# EAGLE board dual-led-wireless-dimmer-tx (EAGLE 8.6.0)
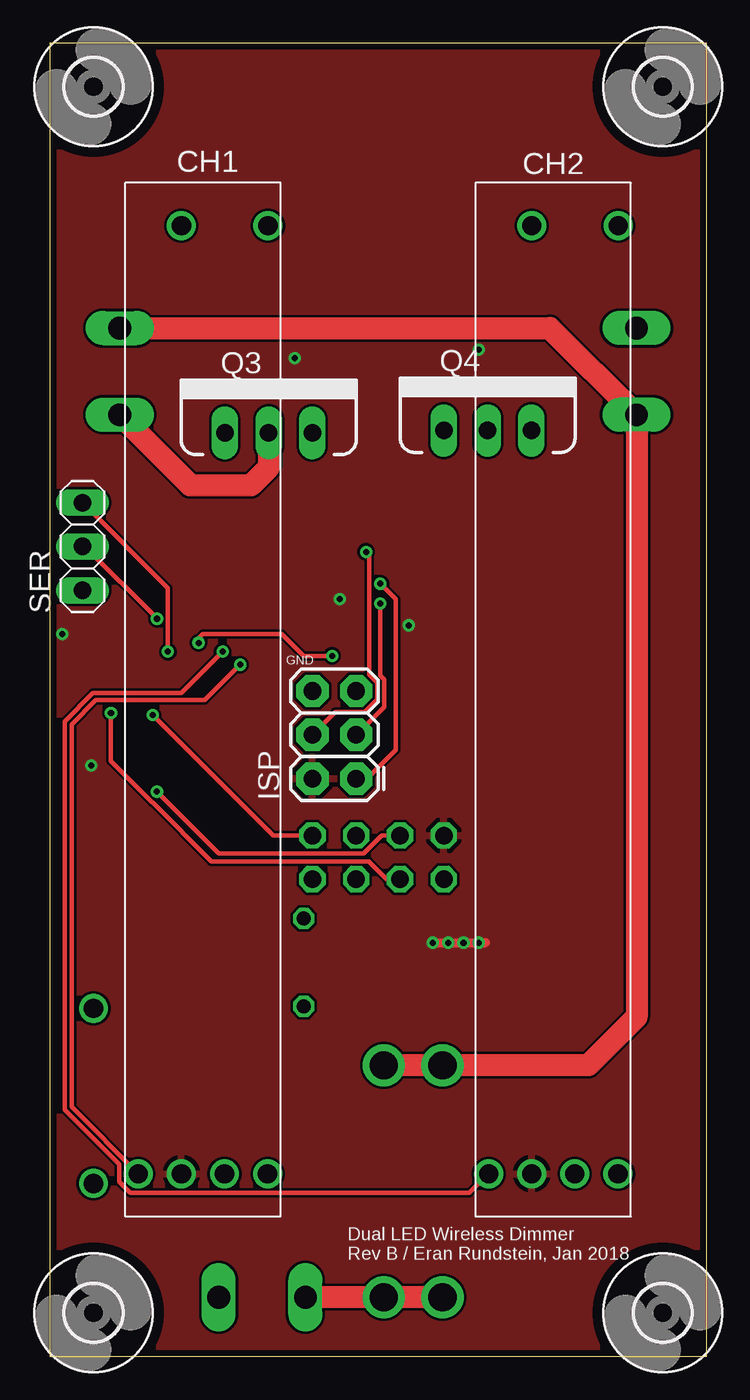
[diagram p0: board, top side]
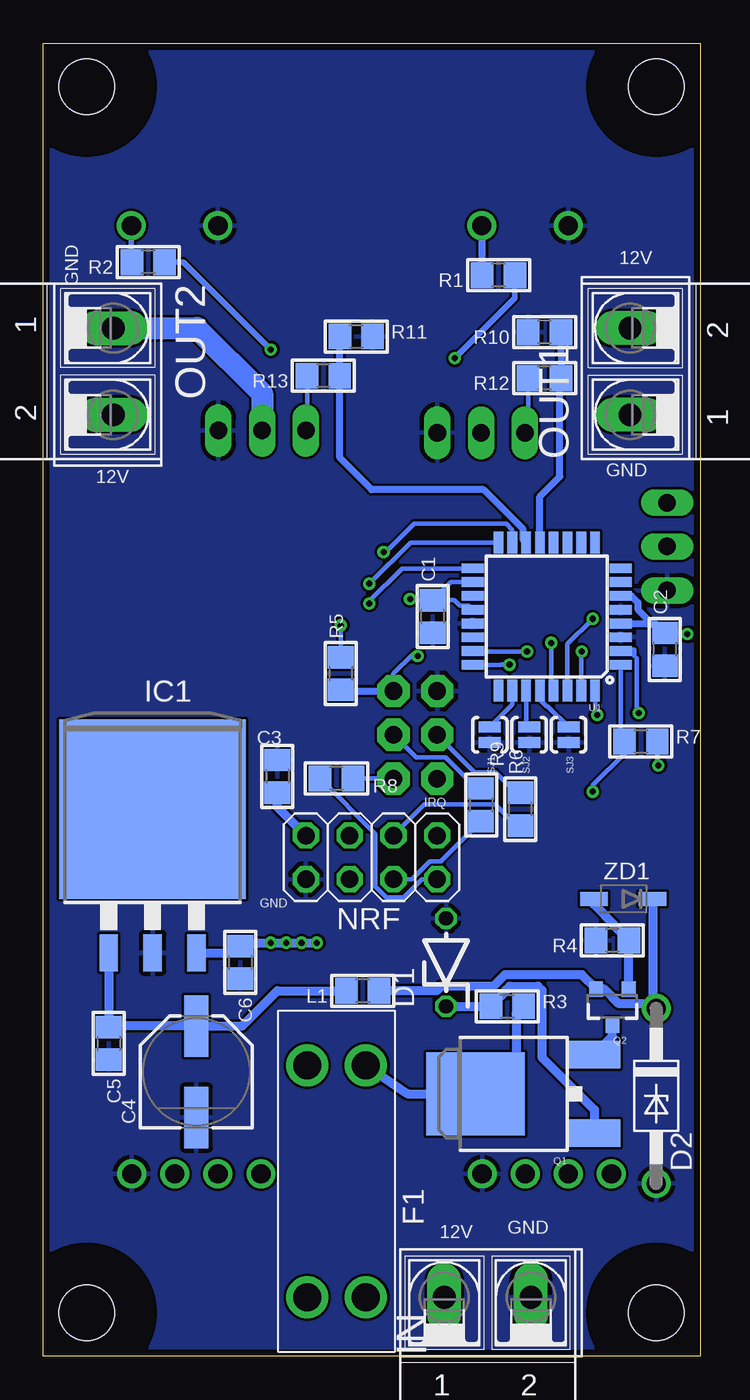
[diagram p1: board, bottom side, seen from below]

Size 38.1 x 76.2 mm. Coordinates in mm from the lower left corner, seen from the top.
Outline: 0,0 38.1,0 38.1,76.2 0,76.2 0,0
Copper layers (1*16): Top 0.0356mm / dielectric 1.5011mm / Bottom 0.0356mm
Design rules "oshpark-2layer-2017-05 *": minimum track width 6mil, minimum drill 13mil, track to track 6mil, track to pad 6mil, pad to pad 6mil, via to via 6mil, smd to smd 6mil, copper to edge 15mil, drill to drill 6mil, minimum pad ring 7mil, minimum via ring 7mil, stop-mask expansion 2.5mil, vias tented up to drill 0mil, thermal gap 10mil
Net classes: 0 default: width 0.254 mm; 1 3.3v: width 0.406 mm

## Footprints (pad centres in the part's own frame; a part is rotated, then mirrored left to right if it is on the bottom)
0805 = smd 1.3 x 1.5: 1 -0.95,0; 2 0.95,0
PANASONIC_D = smd 3.556 x 1.4: + 2.654,0; - -2.654,0
BOURNS-PTL45 = drill 1.118: 1 -27.5,1.25; 2 -27.5,3.75; 3 27.5,1.25; B 27.5,-3.77; E -27.5,-3.75; L -27.5,-1.25
ZDIO-5 = drill 0.813 octagon: A 2.54,0; C -2.54,0
DO41Z10 = drill 1.118: A 5.08,0; C -5.08,0
KEYSTONE-3557-2 = drill 1.626: L1 -6.731,1.702; L2 -6.731,-1.702; R1 6.731,1.702; R2 6.731,-1.702
3,2 = hole 3.2: 0,0
TO263-3 = smd 1.067 x 2.159: 1 -2.54,-5.791; 2 0,-5.791; 3 2.54,-5.791 | smd 10.8 x 10.41: TAB 0,2.54
AK500/2-H = drill 1.321 long: 1 -2.515,0; 2 2.515,0
2X3 = drill 1.016 pad 1.88 octagon: 1 0,0; 2 0,2.54; 3 2.54,0; 4 2.54,2.54; 5 5.08,0; 6 5.08,2.54
2X04 = drill 1.016 octagon: 1 -3.81,-1.27; 2 -3.81,1.27; 3 -1.27,-1.27; 4 -1.27,1.27; 5 1.27,-1.27; 6 1.27,1.27; 7 3.81,-1.27; 8 3.81,1.27
DPAK = smd 1.6 x 3: 1 -2.28,-5.31; 3 2.28,-5.31 | smd 4.826 x 5.715: 4 0,1.588
SOT23-3 = smd 0.8 x 0.9: 1 -0.95,-1; 2 0.95,-1; 3 0,1.1
TO220V = drill 1.016 long: 1 -2.54,0; 2 0,0; 3 2.54,0
1X03 = drill 1.016 long: 1 -2.54,0; 2 0,0; 3 2.54,0
SJ_2S-NO = smd 0.635 x 1.27: 1 -0.45,0; 2 0.45,0
TQFP32-08 = smd 1.27 x 0.559: 1 -4.293,2.8; 2 -4.293,2; 3 -4.293,1.2; 4 -4.293,0.4; 5 -4.293,-0.4; 6 -4.293,-1.2; 7 -4.293,-2; 8 -4.293,-2.8; 17 4.293,-2.8; 18 4.293,-2; 19 4.293,-1.2; 20 4.293,-0.4; 21 4.293,0.4; 22 4.293,1.2; 23 4.293,2; 24 4.293,2.8 | smd 0.559 x 1.27: 9 -2.8,-4.293; 10 -2,-4.293; 11 -1.2,-4.293; 12 -0.4,-4.293; 13 0.4,-4.293; 14 1.2,-4.293; 15 2,-4.293; 16 2.8,-4.293; 25 2.8,4.293; 26 2,4.293; 27 1.2,4.293; 28 0.4,4.293; 29 -0.4,4.293; 30 -1.2,4.293; 31 -2,4.293; 32 -2.8,4.293
SOD123 = smd 1.6 x 0.8: A 1.7,0; C -1.7,0

## Placement (x,y rotation side)
C1  0.1uF  [0805]  15.49,42.93 90 bottom
C2  0.1uF  [0805]  2.03,41.02 90 bottom
C3  4.7uF  [0805]  24.51,33.66 270 bottom
C4  100uF  [PANASONIC_D]  29.21,16.51 90 bottom
C5  0.1uF  [0805]  34.29,18.16 270 bottom
C6  10uF  [0805]  26.67,22.86 270 bottom
CH1  PTL45  [BOURNS-PTL45]  8.89,38.1 90 top
CH2  PTL45  [BOURNS-PTL45]  29.21,38.1 90 top
D1  17V (1N5247B)  [ZDIO-5]  14.73,22.86 90 bottom
D2  24v 1N5359B  [DO41Z10]  2.54,15.11 270 bottom
F1  KEYSTONE-3557-2  [KEYSTONE-3557-2]  21.08,10.16 90 bottom
H1  MOUNT-HOLE3.2  [3,2]  2.54,2.54 0 top
H2  MOUNT-HOLE3.2  [3,2]  35.56,2.54 0 top
H3  MOUNT-HOLE3.2  [3,2]  2.54,73.66 0 top
H4  MOUNT-HOLE3.2  [3,2]  35.56,73.66 0 top
IC1  LM2937IMP-3.3  [TO263-3]  31.75,29.21 0 bottom
IN  [AK500/2-H]  12.32,3.43 0 bottom
ISP  AVR_SPI_PRG_6PTH  [2X3]  17.78,33.53 90 top
L1  ILHB0805ER601V  [0805]  19.56,21.21 180 bottom
NRF  [2X04]  19.05,28.96 0 bottom
OUT1  [AK500/2-H]  4.06,57.15 90 bottom
OUT2  [AK500/2-H]  34.04,57.15 270 bottom
Q1  DN2625K4-G  [DPAK]  11.43,15.24 90 bottom
Q2  SI2323DS-T1-E3  [SOT23-3]  5.08,20.32 180 bottom
Q3  IRL520  [TO220V]  12.7,53.59 0 top
Q4  IRL520  [TO220V]  25.4,53.72 0 top
R1  150  [0805]  11.68,62.74 180 bottom
R2  150  [0805]  32,63.5 180 bottom
R3  100k  [0805]  11.18,20.32 0 bottom
R4  39k  [0805]  5.08,24.13 180 bottom
R5  10k  [0805]  20.83,39.62 90 bottom
R6  220  [0805]  10.41,31.75 90 bottom
R7  10k  [0805]  3.43,35.69 0 bottom
R8  220  [0805]  21.08,33.53 180 bottom
R9  220  [0805]  12.7,32 270 bottom
R10  10k  [0805]  9.02,59.44 180 bottom
R11  10k  [0805]  19.94,59.18 0 bottom
R12  150  [0805]  9.02,56.77 180 bottom
R13  150  [0805]  21.84,56.9 180 bottom
SER  [1X03]  1.91,46.99 90 top
SJ1  SOLDERJUMPERNO  [SJ_2S-NO]  12.19,36.07 270 bottom
SJ2  SOLDERJUMPERNO  [SJ_2S-NO]  9.91,36.07 270 bottom
SJ3  SOLDERJUMPERNO  [SJ_2S-NO]  7.62,36.07 270 bottom
U1  ATMEGA328P_TQFP  [TQFP32-08]  8.89,42.93 180 bottom
ZD1  7.5v BZT52C7V5-7-F  [SOD123]  4.45,26.54 180 bottom

## Library data of the parts
C1-C6 L1 R1-R13 = microbuilder
CH1 = keves-ng; SPICEPREFIX: C
CH2 F1 = keves-ng
D1 D2 = diode
H1-H4 = holes
IC1 = linear
IN OUT1 OUT2 = con-ptr500; OC_FARNELL: unknown; OC_NEWARK: unknown
ISP = SparkFun-Connectors
NRF SER = pinhead
Q1 = SparkFun-DiscreteSemi; PROD_ID: TRANS-09984
Q2 = SparkFun-DiscreteSemi; PROD_ID: TRANS-08285
Q3 Q4 = keves-ng; PROD_ID: TRANS-10060
SJ1-SJ3 = SparkFun-Retired
U1 = SparkFun-DigitalIC; PROD_ID: IC-09069
ZD1 = diodes

## Nets
3.3V: C1.2 C2.2 C3.2 C6.1 CH1.1 CH2.1 IC1.3 ISP.2 NRF.2 R1.1 R2.1 R5.2 R7.2 U1.4 U1.6 U1.18 U1.20
12V: F1.R1 F1.R2 OUT1.2 OUT2.2 Q1.4 R3.2
ADC0: CH1.2 U1.24
ADC1: CH2.2 U1.23
CE: NRF.3 U1.2
CSN: NRF.4 R7.1 U1.1
GND: C1.1 C2.1 C3.1 C4.- C5.2 C6.2 CH1.3 CH1.E CH2.3 CH2.E D1.A D2.A IC1.2 IN.2 ISP.6 NRF.1 Q3.3 Q4.3 R4.2 R10.2 R11.2 SER.1 SJ1.2 SJ2.2 SJ3.2 U1.3 U1.5 U1.21
IRQ: NRF.8 U1.32
MISO: ISP.1 R8.1 U1.16
MOSI: ISP.4 R6.2 U1.15
N$1: Q3.1 R12.2
N$2: Q4.1 R13.2
N$3: CH1.B R1.2
N$4: CH2.B R2.2
N$5: F1.L1 F1.L2 IN.1
N$6: OUT1.1 Q3.2
N$7: NRF.6 R6.1
N$8: OUT2.1 Q4.2
N$9: NRF.7 R8.2
N$10: SJ1.1 U1.26
N$11: D1.C Q1.1 R3.1
N$12: SJ2.1 U1.27
N$13: Q1.3 Q2.3
N$14: Q2.1 R4.1 ZD1.A
N$15: D2.C L1.1 Q2.2 ZD1.C
N$16: SJ3.1 U1.28
N$17: C4.+ C5.1 IC1.1 L1.2
N$19: SER.3 U1.31
N$20: SER.2 U1.30
N$66: NRF.5 R9.2
PWM1: R10.1 R12.1 U1.13
PWM2: R11.1 R13.1 U1.14
RESET: ISP.5 R5.1 U1.29
SCK: ISP.3 R9.1 U1.17

## Tracks (layer width: path | path; a pad name or v marks a point on that pad's centre or on a via)
3.3V  (via drill 0.35)
  Top 0.254: v16.82,43.94 16.89,43.94
  Top 0.406: v0.73,41.91 0.64,41.91
  Top 0.508: v22.23,24 v23.11,24 v24,24 v24.89,24 25.27,24
  Bottom 0.254: C1.2 16.75,43.88 v16.82,43.94 | U1.20 13.42,43.57 13.93,43.57 14.24,43.88 C1.2 | U1.18 14.44,44.93 C1.2 | R5.2 v20.83,42.42 | v2.41,34.29 2.48,34.36 R7.2
  Bottom 0.305: R1.1 10.73,61.4 v14.22,57.91 | R2.1 29.97,63.5 v24.89,58.42
  Bottom 0.406: U1.4 2.79,42.53 | 2.79,42.53 2.59,42.53 | 2.79,42.53 3.61,43.34 3.61,43.75 3.98,44.13 U1.6 | 2.79,42.53 2.24,41.97 C2.2 0.8,41.97 v0.73,41.91
  Bottom 0.508: IC1.3 26.67,23.42 C6.1 26.67,24 v24.89,24 v24,24 v23.11,24 v22.23,24 | NRF.2 24.51,31.88 C3.2
  pour Top: -7.11,78.49 42.16,78.49 44.2,76.45 44.2,-2.03 42.42,-3.81 -2.03,-3.81 -3.05,-2.79 -3.05,74.17 -7.11,78.23
12V
  Top 1.27: F1.R2 F1.R1 31.24,16.89 34.04,19.68 OUT2.2 29.01,59.66 OUT1.2
  Bottom 0.508: F1.R2 16.97,15.24 Q1.4 10.67,15.24 10.67,19.88 R3.2
ADC0  (via drill 0.35)
  Top 0.254: CH1.2 1.27,14.47 1.27,34.92 1.27,35.31 1.27,36.68 2.67,38.08 5.71,38.08 8.99,38.08 v11.05,40.13
  Bottom 0.254: U1.24 11.56,40.13 v11.05,40.13
ADC1  (via drill 0.35)
  Top 0.254: v10.03,40.89 7.62,38.48 2.5,38.48 0.86,36.85 0.86,14.3 4.02,11.14 4.02,10.14 4.68,9.48 24.34,9.48 CH2.2
  Bottom 0.254: U1.23 13.15,40.89 v10.03,40.89
CE  (via drill 0.35)
  Top 0.254: NRF.3 19.56,27.69 18.52,28.73 9.37,28.73 5.97,32.13 5.96,32.13 3.56,34.54 v3.56,37.34
  Bottom 0.254: v3.56,37.34 3.68,37.47 3.68,40.52 3.81,40.65 3.81,41.02 4.5,41.02 U1.2
CSN  (via drill 0.35)
  Top 0.254: NRF.4 19.25,30.23 18.21,29.18 9.8,29.18 v6.22,32.77
  Bottom 0.254: U1.1 4.6,35.91 R7.1 4.38,34.99 6.22,33.15 v6.22,32.77
GND
  pour Bottom: -3.81,77.47 41.91,77.47 41.91,0 39.37,-2.54 -1.27,-2.54 -2.54,-1.27 -2.54,76.2
IRQ  (via drill 0.35)
  Top 0.254: v5.97,37.21 12.95,30.23 NRF.8
  Bottom 0.254: U1.32 6.09,37.33 v5.97,37.21
MISO  (via drill 0.35)
  Top 0.254: v19.18,44.83 20.07,43.94 20.07,35.18 18.41,33.53 ISP.1
  Bottom 0.254: U1.16 16.79,47.22 v19.18,44.83 | R8.1 ISP.1
MOSI  (via drill 0.35)
  Top 0.254: ISP.4 16.56,37.39 18.29,37.39 19,38.1 19,39.11 18.55,39.57 18.55,46.48 v18.35,46.67
  Bottom 0.254: U1.15 10.89,47.95 11.25,48.31 16.58,48.31 18.22,46.67 v18.35,46.67 | ISP.4 13.05,33.88 11.83,33.88 10.65,32.7 R6.2
N$1
  Bottom 0.254: R12.2 9.97,53.79 Q3.1
  Bottom 0.406: 10.16,56.58 R12.2
N$2
  Bottom 0.254: R13.2 22.79,53.79 Q4.1
  Bottom 0.406: 22.86,56.83 R13.2
N$3
  Bottom 0.406: R1.2 12.63,65.57 CH1.B
N$4
  Bottom 0.305: R2.2 32.98,63.53 CH2.B
N$5
  Top 1.27: F1.L1 F1.L2 IN.1
N$6
  Top 1.27: Q3.2 12.7,51.56 11.68,50.55 8.15,50.55 OUT1.1
N$7
  Bottom 0.254: R6.1 10.65,30.8 11.88,32.02 15.98,32.02 NRF.6
N$8
  Bottom 1.27: OUT2.1 29.18,59.66 25.4,55.88 Q4.2
N$9
  Bottom 0.254: R8.2 18.82,30.32 18.82,27.25 18.21,26.64 17.18,26.64 16.14,27.69 NRF.7
N$10
  Bottom 0.254: SJ1.1 10.89,37.82 U1.26
N$11
  Bottom 0.508: D1.C R3.1 11.28,21.16 11.28,21.24 11.04,21.48 9.41,21.48 9.17,21.24 9.17,17.36 6.12,14.31 Q1.1
N$12
  Bottom 0.254: U1.27 10.09,36.7 SJ2.1
N$13
  Bottom 0.508: Q1.3 5.08,18.56 Q2.3
N$14
  Bottom 0.508: Q2.1 R4.1 4.97,24.97 4.97,25.05 6.14,26.22 ZD1.A
N$15
  Bottom 0.508: ZD1.C 2.75,20.4 D2.C 2.81,20.46 4.7,20.46 5.55,21.32 Q2.2 6.85,22.14 11.32,22.14 11.98,21.48 15.01,21.48 15.28,21.21 L1.1
N$16
  Bottom 0.254: SJ3.1 8.82,37.72 8.88,37.72 9.29,38.12 U1.28
N$17
  Bottom 0.508: IC1.1 C5.1 34.24,19.16 C4.+ 26.56,19.16 24.51,21.21 L1.2
N$19  (via drill 0.35)
  Top 0.254: v6.86,40.89 6.86,44.58 SER.3
  Bottom 0.254: U1.31 6.89,40.61 6.86,40.64 v6.86,40.89
N$20  (via drill 0.35)
  Top 0.254: v6.23,42.8 2.04,46.99 SER.2
  Bottom 0.254: U1.30 7.69,41.33 v6.23,42.8
N$66
  Bottom 0.254: R9.2 15.03,28.73 15.67,28.73 16.71,27.69 NRF.5
PWM1
  Bottom 0.406: R10.1 R12.1 8.13,56.71 8.13,51.05 9.29,49.89 U1.13
PWM2
  Bottom 0.406: U1.14 10.26,47.38 10.26,48 12.55,50.29 19.05,50.29 20.89,52.14 R13.1 R11.1
RESET  (via drill 0.35)
  Top 0.254: v16.38,40.64 14.73,40.64 13.46,41.91 8.89,41.91 8.51,41.53 v8.64,41.4
  Bottom 0.254: ISP.5 17.78,39.62 16.64,40.77 16.51,40.64 v16.38,40.64 | v8.64,41.4 8.64,38.78 U1.29
  Bottom 0.406: R5.1 20.76,38.61 ISP.5
SCK  (via drill 0.35)
  Top 0.254: v19.18,43.69 19.18,39.51 19.41,39.28 19.41,37.69 ISP.3
  Bottom 0.254: U1.17 17.27,45.73 19.18,43.81 v19.18,43.69 | R9.1 12.94,32.95 14.73,34.75 16.46,34.75 ISP.3

## Text on the board
tPlace: GND
bPlace: IRQ | GND
tNames: Dual LED Wireless Dimmer / Rev B / Eran Rundstein, Jan 2018
bNames: GND | 12V | GND | 12V | GND | 12V